# Altium PCB Laderegler.PcbDoc
Units mm, origin at the board's own origin, x right, y up, seen from the top; angles counter-clockwise.
Board outline 38.1 x 27.94 mm, 2 copper layers (Top Layer, Bottom Layer); 28 components, 19 nets, 75 pads, 7 vias.
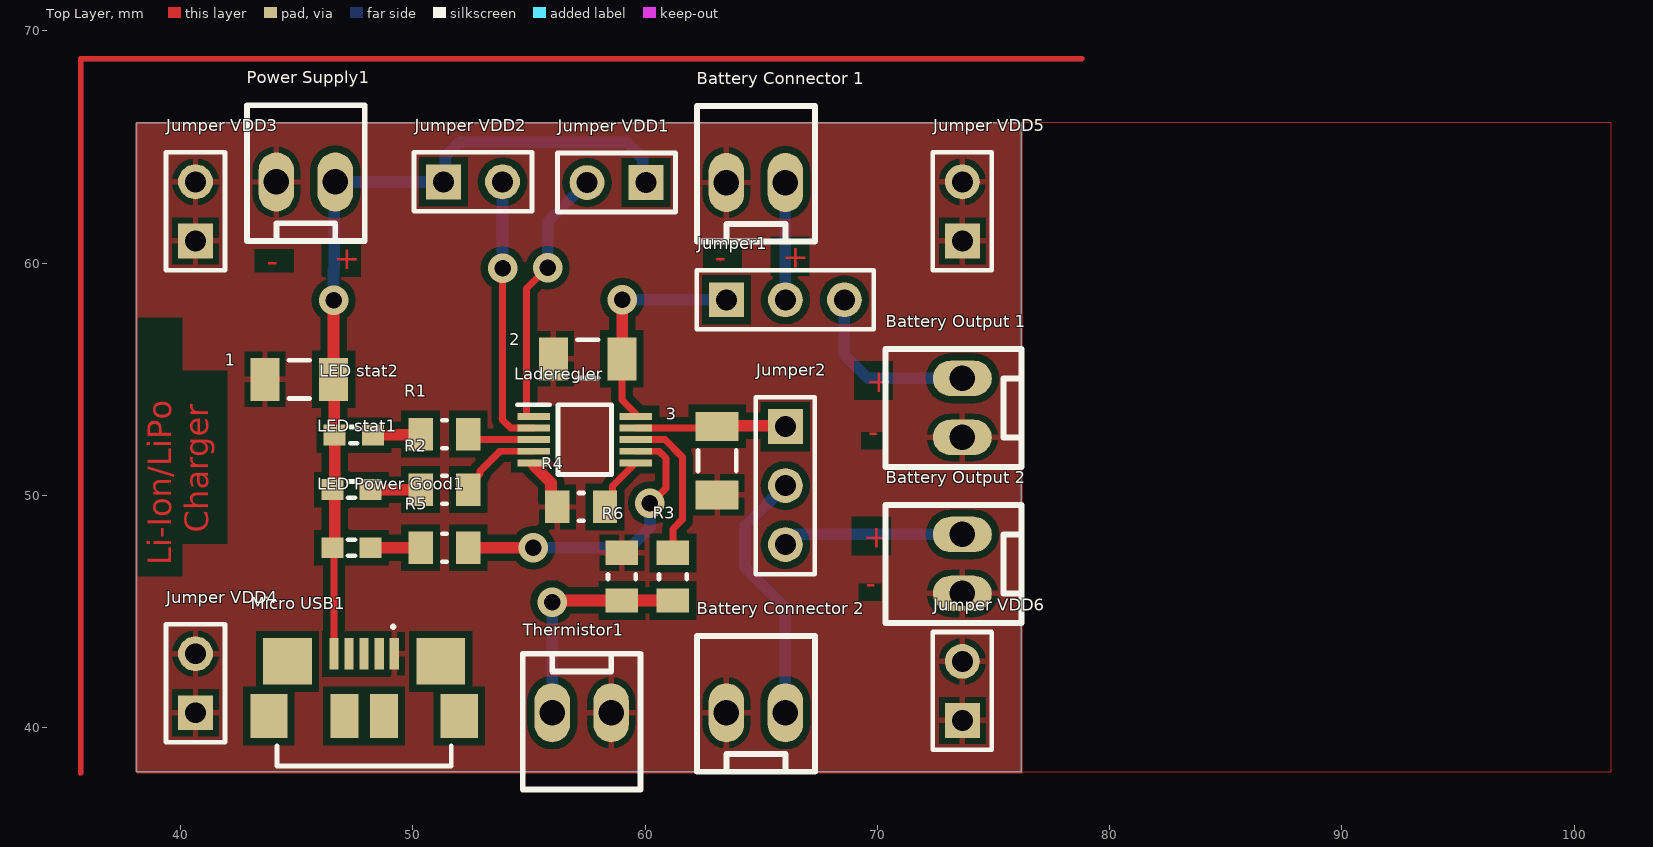
[diagram p0: Top Layer view]
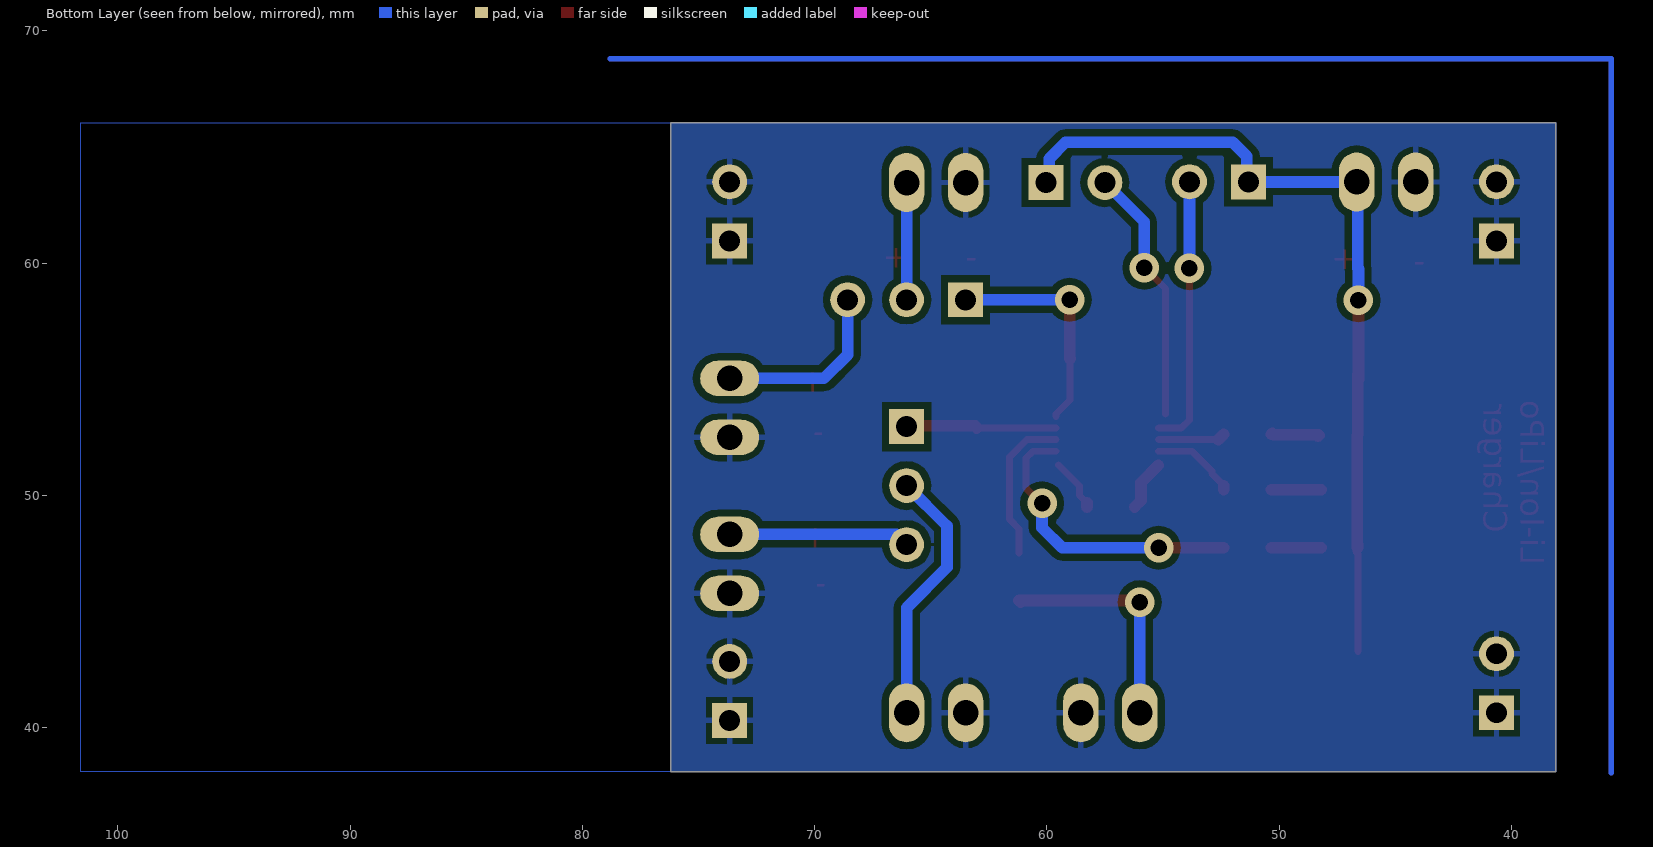
[diagram p1: Bottom Layer view, seen from below]
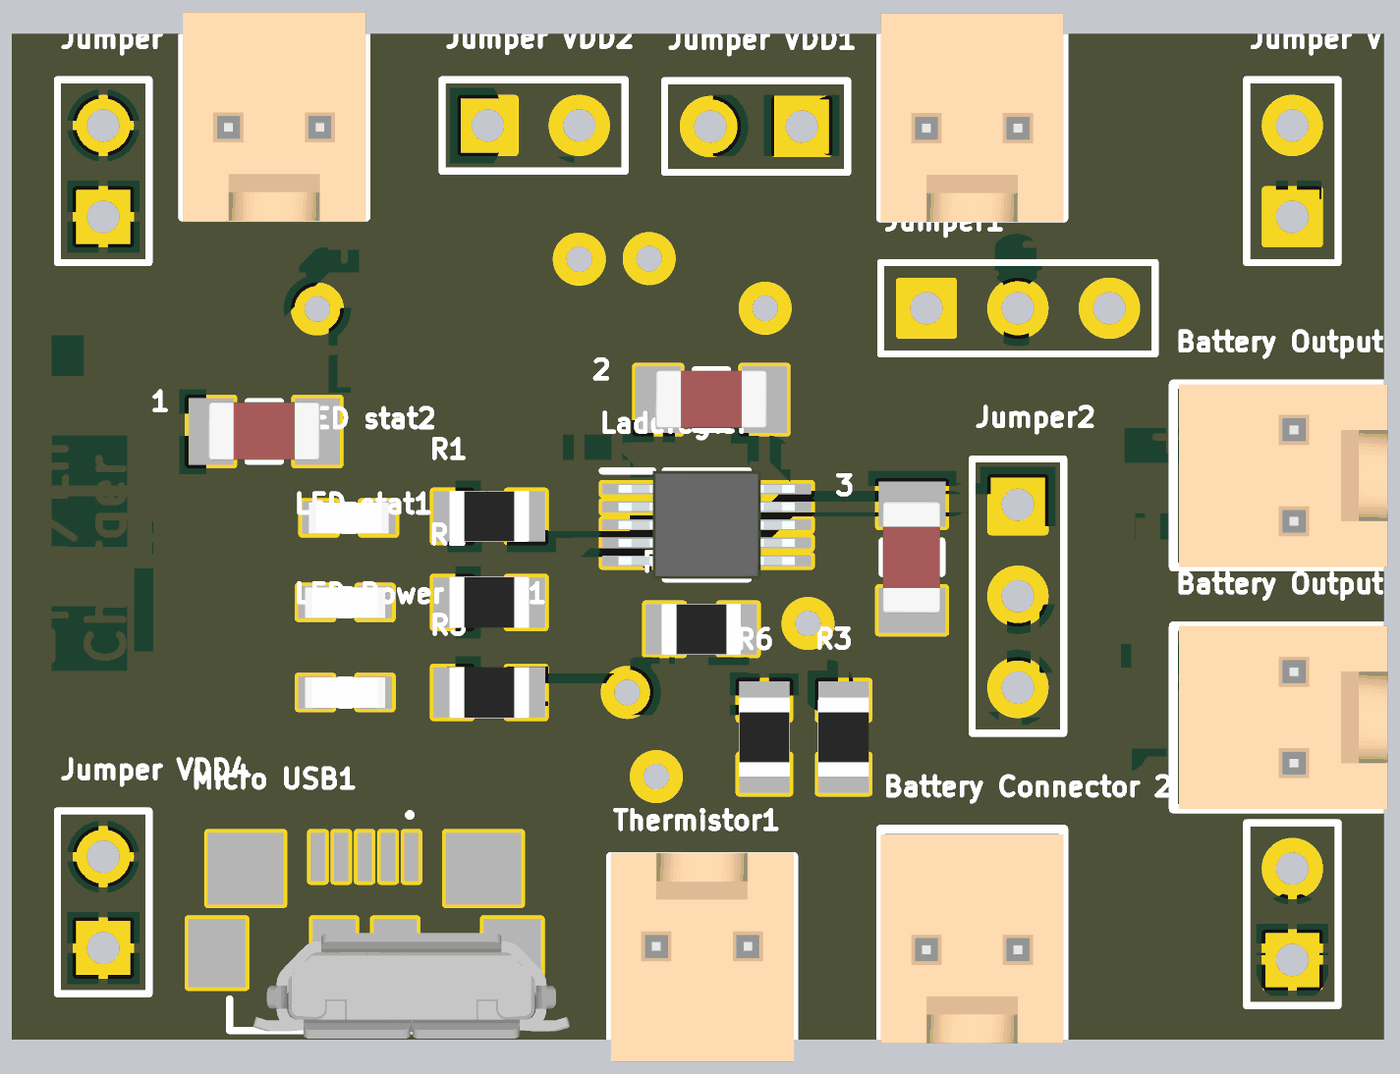
[diagram p2: 3D render of the assembled board from above, using the file's embedded part models]

## Layer stack, top to bottom
Top Solder: solder mask 0.0102, Solder Resist, Dk 3.5
Top Layer: signal copper 0.0356
Dielectric 1: dielectric 0.32, FR-4, Dk 4.8
Bottom Layer: signal copper 0.0356
Bottom Solder: solder mask 0.0102, Solder Resist, Dk 3.5

## Board outline
38.1,38.1 76.2,38.1 76.2,66.04 38.1,66.04

## Design rules (kind name [scope] priority, off if disabled: settings)
Clearance [All] p1: gap=0.3 ignorepadtopadclearanceinfootprint=TRUE
MinimumSolderMaskSliver [All] p1: minsoldermaskwidth=0.1
PolygonConnect [All] p1: connectstyle=Relief reliefconductorwidth=0.254 reliefentries=4 polygonreliefangle="90 Angle" airgapwidth=0.254
RoutingVias [All] p1: holewidth=0.711 width=1.7 viastyle="Through Hole" minholewidth=0.711 minwidth=1.6 maxholewidth=0.711 maxwidth=1.7
SolderMaskExpansion [All] p1: expansion=0.102
Width [All] p1: maxlimit=0.6 minlimit=0.2 preferedwidth=0.5 minimp=50.000000 maximp=50.000000 favimp=50.000000
29 further rules are at their usual default settings.

## Components (designator, comment, footprint, x,y, rotation, side; value= is the part's Value field where it differs from the comment)
1 "VJ1206" VJ1206 45.11,54.995 r180 top value=1µF
2 "VJ1206" VJ1206 57.525,55.88 r180 top value=1µF
3 "VJ1206" VJ1206 63.1,51.5 r270 top value=1µF
"Battery Connector 1" "2er Stiftleiste" "2er Stiftleiste WR-WTB" 66.04,63.47 r180 top
"Battery Connector 2" "2er Stiftleiste" "2er Stiftleiste WR-WTB" 66.04,40.64 r180 top
"Battery Output 1" "2er Stiftleiste" "2er Stiftleiste WR-WTB" 73.66,55.04 r270 top
"Battery Output 2" "2er Stiftleiste" "2er Stiftleiste WR-WTB" 73.66,48.32 r270 top
Jumper1 "Header 3" HDR1X3 63.5,58.42 r0 top
Jumper2 "Header 3" HDR1X3 66.04,52.96 r270 top
"Jumper VDD1" "Header 2" HDR1X2 60.04,63.47 r180 top
"Jumper VDD2" "Header 2" HDR1X2 51.32,63.5 r0 top
"Jumper VDD3" "Header 2" HDR1X2 40.64,60.96 r90 top
"Jumper VDD4" "Header 2" HDR1X2 40.64,40.64 r90 top
"Jumper VDD5" "Header 2" HDR1X2 73.66,60.96 r90 top
"Jumper VDD6" "Header 2" HDR1X2 73.66,40.31 r90 top
Laderegler "MCP73833-AMI_UN" SOP50P490X110-10N 57.4,52.4 r0 top
"LED Power Good1" "LED SMD 0603" "SMD LED 0603" 47.36,47.745 r0 top
"LED stat1" "LED SMD 0603" "SMD LED 0603" 47.36,50.245 r0 top
"LED stat2" "LED SMD 0603" "SMD LED 0603" 47.46,52.595 r0 top
"Micro USB1" "ZX62R-B-5P_30_" ZX62R-B-5P(30) 47.9,38.35 r0 top
"Power Supply1" "2er Stiftleiste" "2er Stiftleiste WR-WTB" 46.66,63.495 r180 top
R1 "RES 0805" D12CRCW0805 51.36,52.635 r0 top value=1k
R2 "RES 0805" D12CRCW0805 51.36,50.245 r0 top value=1k
R3 "RES 0805" D12CRCW0805 61.2,46.5 r90 top value=1k
R4 "RES 0805" D12CRCW0805 57.25,49.5 r0 top value=1k
R5 "RES 0805" D12CRCW0805 51.36,47.745 r0 top value=1k
R6 "RES 0805" D12CRCW0805 59,46.5 r270 top value=1k
Thermistor1 "2er Stiftleiste" "2er Stiftleiste WR-WTB" 56,40.64 r0 top

## Footprints (in the part's own frame and the unit in brackets; to place one, negate y for a bottom-side part, rotate by r counter-clockwise, add the part's x,y. Pads: shape width x height; smd on the part's side, far side on the other; paste and mask are expansions set on the pad)
"2er Stiftleiste WR-WTB" [mm] "2.54MM MALE LOCKING HEADER WÜRTH"
  rrect100% 1.524x2.54 hole 1.1: 1(0,0) 2(2.54,0)
  silkscreen extent -1.27,-3.3 3.81,2.54, body extent -1.27,-3.15 3.81,2.65, height 11.55
D12CRCW0805 [mm] "Chip Resistor, 2-Leads, Body 2,1x1,3mm, IPC Medium Density"
  rect 1.05x1.4 smd: 1(-1.025,0) 2(1.025,0)
  silkscreen extent -0.1,-0.6 0.1,0.6, body extent -1.1,-0.71 1.1,0.71, height 0.51
HDR1X2 [mm] "Connector; Header; 2 Position"
  rect 1.5x1.5 hole 0.9: 1(0,0)
  round 1.5 hole 0.9: 2(2.54,0)
  silkscreen extent -1.27,-1.27 3.81,1.27
HDR1X3 [mm] "Connector; Header; 3 Position"
  rect 1.5x1.5 hole 0.9: 1(0,0)
  round 1.5 hole 0.9: 2(2.54,0) 3(5.08,0)
  silkscreen extent -1.27,-1.27 6.35,1.27
"SMD LED 0603" [mm] "Chip-Capacitor, 0603, found on Farnell"
  rect 0.95x0.9 smd: 1(-0.825,0) 2(0.825,0)
  silkscreen extent -0.15,-0.35 0.15,0.35, body extent -1.11,-0.43 1.11,0.42, height 1
SOP50P490X110-10N [mm]
  rect 1.4x0.3 smd: 1(-2.2,1) 2(-2.2,0.5) 3(-2.2,0) 4(-2.2,-0.5) 5(-2.2,-1) 6(2.2,-1) 7(2.2,-0.5) 8(2.2,0) 9(2.2,0.5) 10(2.2,1)
  silkscreen extent -2.9,-1.5 1.15,1.5, body extent -2.45,-1.5 2.45,1.5, height 1.1
VJ1206 [mm] "Ceramic Chip Capacitor Vishay Vitramon"
  rect 1.25x1.85 smd: 1(-1.475,0) 2(1.475,0)
  silkscreen extent -0.45,-0.82 0.45,0.82, body extent -1.56,-0.81 1.56,0.79, height 1.7
ZX62R-B-5P(30) [mm]
  rect 0.4x1.35 smd: 1(1.3,4.825) 2(0.65,4.825) 3(0,4.825) 4(-0.65,4.825) 5(-1.3,4.825)
  rect 2.1x2 smd: 6(-3.3,4.5) 7(3.3,4.5)
  rect 1.6x1.9 smd: 8(-4.1,2.15) 9(4.1,2.15)
  rect 1.2x1.9 smd: 10(-0.85,2.15) 11(0.85,2.15)
  silkscreen extent -3.75,0 3.75,6.02, body extent -3.1,-0.23 5.7,2.71, height 5.6

## Part data
1 2 3: "Ceramic Chip Capacitor Vishay Vitramon", Fitted=False
"Battery Connector 1" "Battery Connector 2" "Battery Output 1" "Battery Output 2" "Power Supply1" Thermistor1: "2er Stiftleiste WR-WTB 2,54mm"
Jumper1 Jumper2: "Header, 3-Pin", LatestRevisionDate=17-Jul-2002, LatestRevisionNote="Re-released for DXP Platform.", Publisher="Altium Limited"
"Jumper VDD1" "Jumper VDD2" "Jumper VDD3" "Jumper VDD4" "Jumper VDD5" "Jumper VDD6": "Header, 2-Pin", LatestRevisionDate=17-Jul-2002, LatestRevisionNote="Re-released for DXP Platform.", Publisher="Altium Limited"
Laderegler: "Integrated Circuit", Manufacturer_Name=Microchip, Manufacturer_Part_Number=MCP73833-AMI/UN, Mouser2 Part Number=579-MCP73833-AMI/UN, Datasheet Link=https://componentsearchengine.com//MCP73833-AMI_UN.pdf, Height=1.1mm, Mouser2 Price/Stock=https://www.mouser.com/Search/Refine.aspx?Keyword=579-MCP73833-AMI%2FUN
"Micro USB1": "Connector", Manufacturer_Name=Hirose, Manufacturer_Part_Number=ZX62R-B-5P(30)
R1 R2 R3 R4 R5 R6: "Chip Resistor 0805", Supplier Part Number 1=1738935, Fitted=False, Supplier 1=Farnell

## Via types
v1: diameter 1.27, hole 0.711, Top Layer to Bottom Layer, 7 vias

## Nets (pads, with @x,y where several pads share a name; then routed paths per layer and width w, separated by ;. In a path a pad name is that pad's centre, name@x,y a point inside that pad or via, vN(x,y) a via of type N, cw(c..) or ccw(c..) an arc to the next point about the centre after c; other vN are vias at no path point)
"5V Ladespannung": 1.1 "Jumper VDD1.1" "Jumper VDD2.1" "LED Power Good1.1" "LED stat1.1" "LED stat2.1" "Micro USB1.5" "Power Supply1.1" | length 36.8
  Top Layer w0.254: 46.635,63.47 46.66,63.495
  Top Layer w0.3: 46.535,47.745 46.7,47.58 46.6,47.48 46.6,43.275
  Top Layer w0.5: 1.1 1.1@46.585,55.245 ; v1(46.585,58.4) 1.1@46.585,55.245 ; 46.617,47.892 46.617,47.745 46.635,47.762 46.635,52.595 46.61,52.62 46.61,55.22 1.1@46.585,55.245 ; 46.66,63.495 46.672,63.482 ; 51.295,63.475 51.32,63.5
  Bottom Layer w0.5: v1(46.585,58.4) 46.585,59.745 46.623,59.782 46.623,63.458 46.66,63.495 51.315,63.495 51.32,63.5 51.4,63.58 51.4,64.6 52,65.2 59.2,65.2 59.9,64.5 59.9,63.61 60.04,63.47
"Battery 2 Output": "Battery Output 1.1" Jumper1.3 | length 7.9
  Bottom Layer w0.5: Jumper1.3 68.58,56.06 69.6,55.04 73.66,55.04
GND: 1.2 2.2 3.2 "Battery Connector 1.2" "Battery Connector 2.2" "Battery Output 1.2" "Battery Output 2.2" "Jumper VDD3.1" "Jumper VDD3.2" "Jumper VDD4.1" "Jumper VDD4.2" "Jumper VDD5.1" "Jumper VDD5.2" "Jumper VDD6.1" "Jumper VDD6.2" "Micro USB1.1" "Power Supply1.2" Laderegler.5 R4.1 R6.1 Thermistor1.2 | length 2.3
  Top Layer w0.3: Laderegler.5@55.2,51.3 Laderegler.5
  Top Layer w0.5: Laderegler.5@55.2,51.3 55.95,50.55 55.95,49.775 R4.1
Net2_1: 2.1 Jumper1.1 Laderegler.10 | length 9.8
  Top Layer w0.3: 2.1 59,54.1 59.6,53.5 Laderegler.10
  Top Layer w0.5: 2.1 59.01,55.89 59.01,58.41 v1(59.02,58.42)
  Bottom Layer w0.5: v1@59,58.44 v1(59.02,58.42) Jumper1.1 Jumper1.1@63.52,58.44
Net3_1: 3.1 Jumper2.1 Laderegler.9 | length 6.5
  Top Layer w0.3: Laderegler.9 3.1@63.025,52.9
  Top Layer w0.5: 3.1@63.025,52.9 3.1 3.1@63.09,52.985 ; 3.1@63.09,53 66,53 Jumper2.1
  Bottom Layer w0.5: Jumper2.1@66.02,52.98 Jumper2.1
"NetBattery Connector 1_1": "Battery Connector 1.1" Jumper1.2 | length 5.1
  Bottom Layer w0.5: Jumper1.2 66.04,63.47
"NetBattery Connector 2_1": "Battery Connector 2.1" Jumper2.2 | length 11.2
  Bottom Layer w0.5: Jumper2.2@66.035,50.425 Jumper2.2 64.3,48.68 64.3,46.9 66.035,45.165 66.035,40.645 66.04,40.64
"NetBattery Output 2_1": "Battery Output 2.1" Jumper2.3 | length 7.8
  Bottom Layer w0.5: Jumper2.3 66.48,48.32 73.66,48.32
"NetJumper VDD1_2": "Jumper VDD1.2" Laderegler.1 | length 11
  Top Layer w0.3: Laderegler.1@54.9,53.5 54.9,58.9 v1(55.8,59.8)
  Bottom Layer w0.5: v1(55.8,59.8) 55.8,61.77 57.5,63.47
"NetJumper VDD2_2": "Jumper VDD2.2" Laderegler.2 | length 11.7
  Top Layer w0.3: v1(53.86,59.782) 53.86,53.254 54.214,52.9 Laderegler.2
  Bottom Layer w0.5: 53.82,63.495 53.86,63.455 v1(53.86,59.782)
NetLaderegler_3: Laderegler.3 R1.2 | length 2.9
  Top Layer w0.3: R1.2@52.62,52.4 Laderegler.3
  Top Layer w0.5: R1.2 R1.2@52.62,52.4
NetLaderegler_4: Laderegler.4 R2.2 | length 3.6
  Top Layer w0.3: R2.2@52.385,50.42 R2.2@52.9,50.935 ; 52.9,51.05 53.75,51.9 Laderegler.4
  Top Layer w0.5: R2.2 R2.2@52.385,50.42
NetLaderegler_6: Laderegler.6 R4.2 | length 2.3
  Top Layer w0.3: R4.2@58.275,49.675 58.6,50 58.6,50.4 Laderegler.6@59.5,51.3
  Top Layer w0.5: R4.2 R4.2@58.275,49.675
NetLaderegler_7: Laderegler.7 R5.2 | length 12.9
  Top Layer w0.3: Laderegler.7 60.6,51.9 60.893,51.607 60.893,50.307 v1@60.246,49.66
  Top Layer w0.5: R5.2 v1(55.19,47.745) ; v1(60.21,49.66) v1@60.246,49.66
  Bottom Layer w0.5: v1(55.19,47.745) 59.345,47.745 60.21,48.61 v1(60.21,49.66)
NetLaderegler_8: Laderegler.8 R3.2 | length 6.6
  Top Layer w0.3: Laderegler.8 60.848,52.4 61.6,51.648 61.6,48.956 61.2,48.556 R3.2
"NetLED Power Good1_2": "LED Power Good1.2" R5.1 | length 2.2
  Top Layer w0.5: 48.185,47.745 R5.1
"NetLED stat1_2": "LED stat1.2" R2.1 | length 2.2
  Top Layer w0.5: 48.185,50.245 R2.1
"NetLED stat2_2": "LED stat2.2" R1.1 | length 2.2
  Top Layer w0.5: 48.327,52.552 48.285,52.595 48.305,52.615 50.23,52.615 50.292,52.677 R1.1
NetR3_1: R3.1 R6.2 Thermistor1.1 | length 10.1
  Top Layer w0.5: v1@56,45.475 57.1,45.475 R3.1 R3.1@61.13,45.405
  Bottom Layer w0.5: v1(56,45.405) Thermistor1.1 Thermistor1.1@56.054,40.586
pads on no net: "Micro USB1.2" "Micro USB1.3" "Micro USB1.4" "Micro USB1.6" "Micro USB1.7" "Micro USB1.8" "Micro USB1.9" "Micro USB1.10" "Micro USB1.11"
copper on no net: | length 147.7
  Top Layer w0.254: 35.7,38.055 35.7,68.8 78.8,68.8
  Bottom Layer w0.254: 35.7,38.055 35.7,68.8 78.8,68.8

## Polygon pours and split planes (outlines as drawn)
GND on Top Layer (solid, pour order 10): 76.24,38.1 76.24,65.995 76.195,66.04 38.14,66.04 38.14,38.14 38.1,38.1
GND on Top Layer "Top Layer-GND" (solid, shelved, pour order 6): 38.14,38.055 76.24,38.055 76.24,65.995 38.14,65.995
GND on Top Layer "Top Layer-No Net" (solid, shelved, pour order 0): 38.1,38.1 101.6,38.1 101.6,66.04 38.1,66.04
GND on Bottom Layer (solid, pour order 12): 38.1,38.055 38.145,38.1 76.2,38.1 76.2,66.04 38.1,66.04
GND on Bottom Layer "Bottom Layer-GND" (solid, shelved, pour order 8): 38.1,38.1 76.2,38.1 76.2,66.04 38.1,66.04
GND on Bottom Layer "Bottom Layer-No Net" (solid, shelved, pour order 4): 38.1,38.1 101.6,38.1 101.6,66.04 38.1,66.04
no net on Bottom Layer "Bottom Layer-No Net 1" (solid, shelved, pour order 2): 35.56,53.34

## Other copper
Top Layer:
  text "-" at 63,59.782 h1
  text "+" at 65.9,59.8 h1
  text "+" at 46.585,59.745 h1
  text "-" at 43.7,59.6 h1
  text "+" at 69.5,54.45 h1
  text "-" at 69.6,52 h1.52
  text "Charger" at 41.2,48.4 h1 r90
  text "+" at 69.4,47.75 h1
  text "Li-Ion/LiPo" at 39.6,47 h1 r90
  text "-" at 69.5,45.475 h1.52

## Text inside footprints (layer, text, board x,y; h text height)
"LED Power Good1": Mechanical 15 "+" at 45.963,48.634 h1
"LED stat1": Mechanical 15 "+" at 45.963,51.134 h1
"LED stat2": Mechanical 15 "+" at 46.063,53.484 h1